# Altium PCB Batarang.PcbDoc
Units mil, origin at the board's own origin, x right, y up, seen from the top; angles counter-clockwise.
Board outline 787.4 x 2047.24 mil, 2 copper layers (Top Layer, Bottom Layer); 53 components, 36 nets, 216 pads, 35 vias.
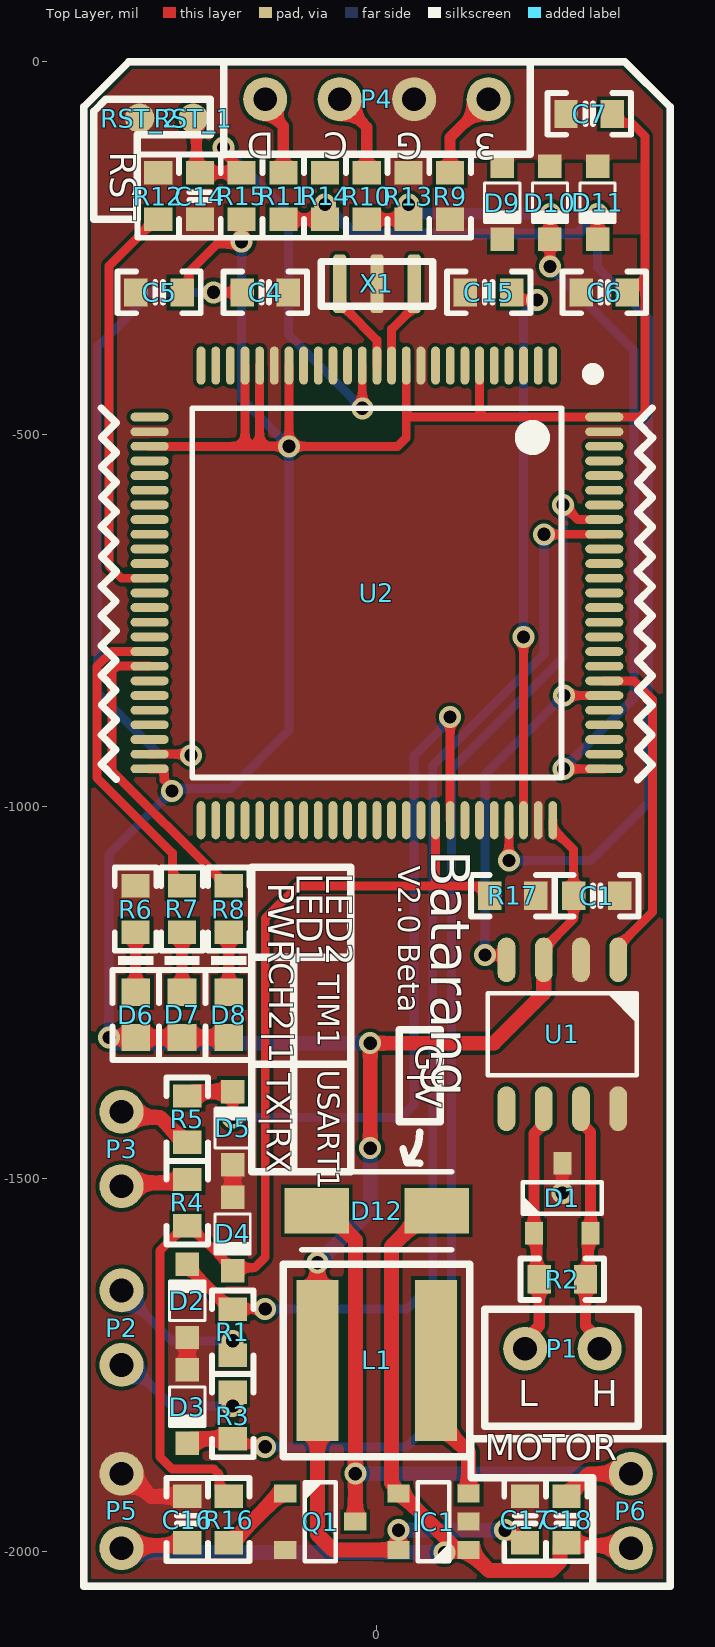
[diagram p0: Top Layer view]
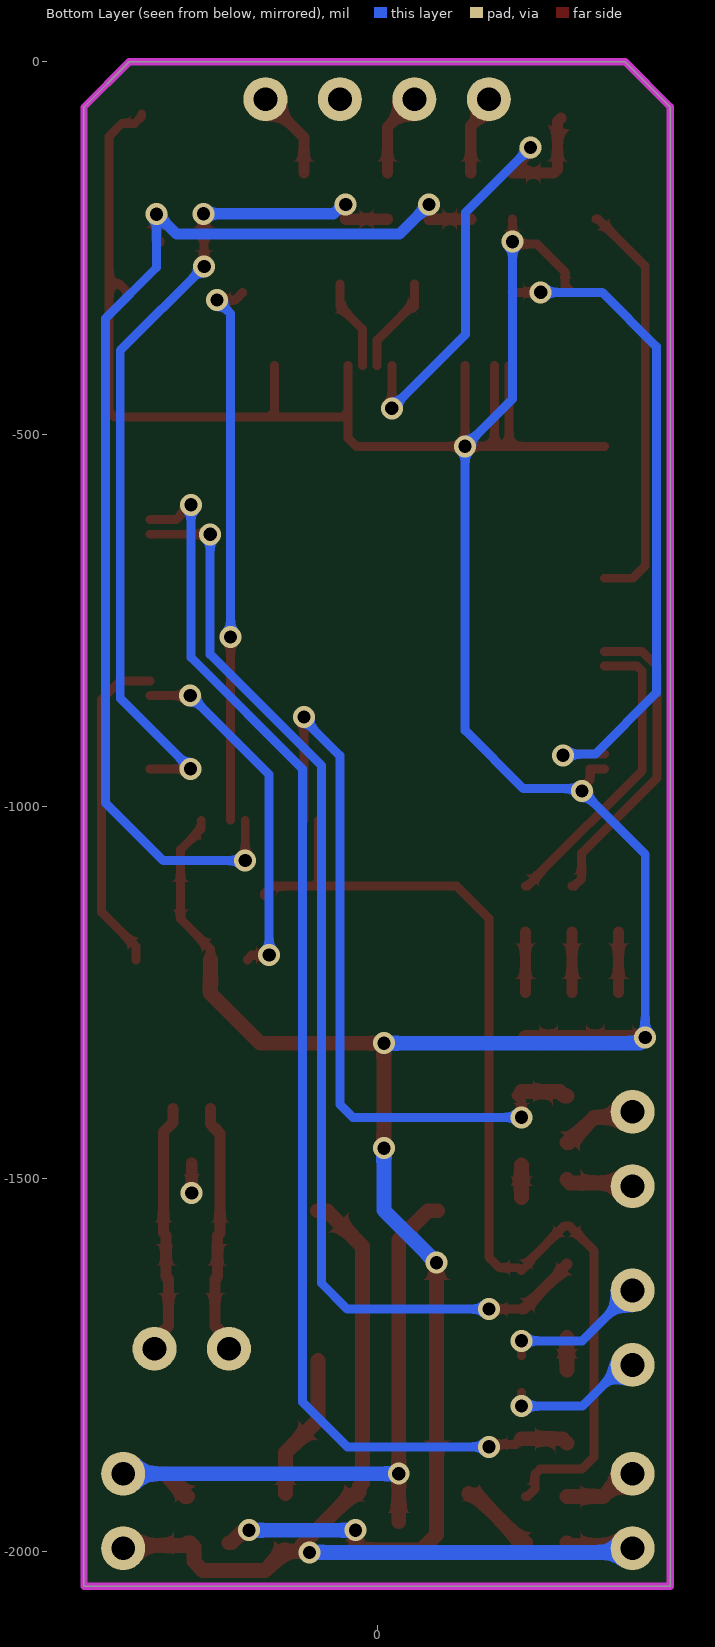
[diagram p1: Bottom Layer view, seen from below]
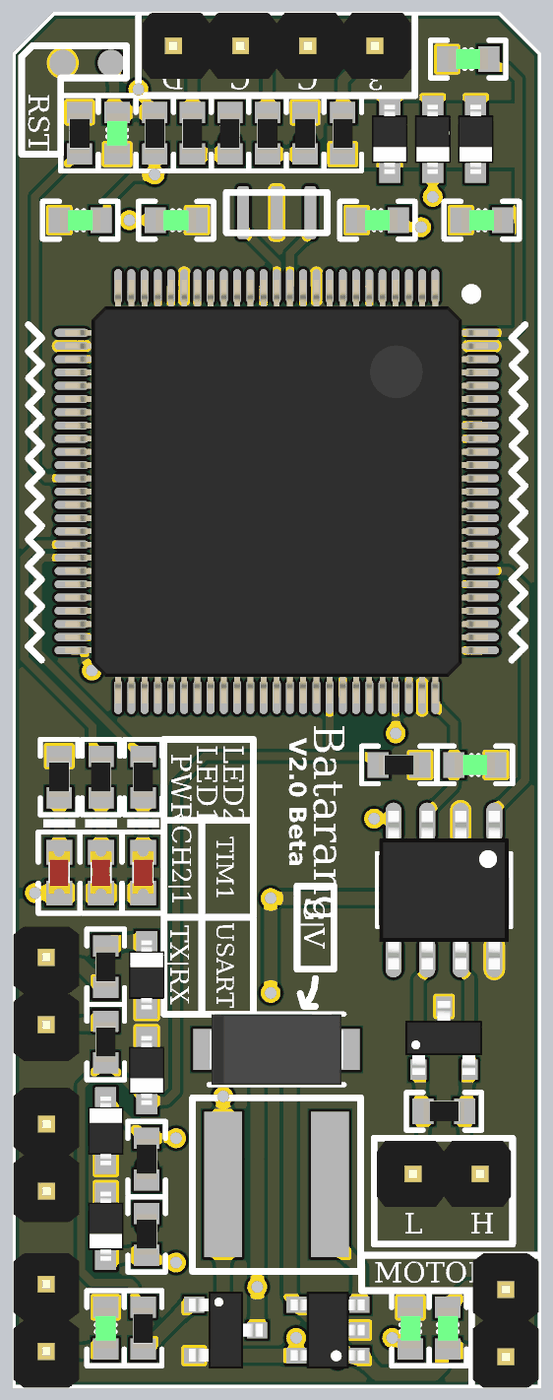
[diagram p2: 3D render of the assembled board from above, using the file's embedded part models]

## Layer stack, top to bottom
Top Solder: solder mask 0.4, Solder Resist, Dk 3.5
Top Layer: signal copper 1.4
Dielectric 1: dielectric 12.6, FR-4, Dk 4.8
Bottom Layer: signal copper 1.4
Bottom Solder: solder mask 0.4, Solder Resist, Dk 3.5

## Board outline
-393.7,-2047.24 -393.7,-60.7 -333,0 332.97,0 393.7,-60.73 393.7,-2047.24

## Design rules (kind name [scope] priority, off if disabled: settings)
Clearance [All] p1: gap=5 ignorepadtopadclearanceinfootprint=TRUE
DiffPairsRouting [All] p1: maxlimit=10 minlimit=10 mostfreqgap=10 toplayer_minwidth=15 toplayer_maxwidth=15 toplayer_prefwidth=15 bottomlayer_minwidth=15 bottomlayer_maxwidth=15 bottomlayer_prefwidth=15 maxuncoupledlength=500
PlaneConnect [All] p1: planeconnectstyle=Direct reliefexpansion=20 reliefentries=4 reliefconductorwidth=10 reliefairgap=10
PolygonConnect [All] p1: connectstyle=Direct reliefconductorwidth=10 reliefentries=4 polygonreliefangle="90 Angle" airgapwidth=10
RoutingVias [All] p1: holewidth=17.72 width=29.53 viastyle="Through Hole" minholewidth=17.72 minwidth=29.53 maxholewidth=17.72 maxwidth=29.53
SolderMaskExpansion [All] p1: expansion=4 istentingtop=FALSE
Width [All] p1: maxlimit=50 minlimit=10 preferedwidth=12
28 further rules are at their usual default settings.

## Classes and differential pairs
component class U_Power: C16 C17 C18 D12 IC1 L1 P5 P6 Q1 R16 R17
component class U_MCU: C4 C5 C6 C7 C14 C15 D9 D10 D11 P4 R9 R10 R11 R12 R13 R14 R15 RST_1 RST_2 U2 X1
component class U_Dev: C1 D1 D2 D3 D4 D5 D6 D7 D8 P1 P2 P3 R1 R2 R3 R4 R5 R6 R7 R8 U1
differential pair OSC: +OSC_P -OSC_N
differential pair CAN: +CAN_P -CAN_N

## Components (designator, comment, footprint, x,y, rotation, side; value= is the part's Value field where it differs from the comment)
C1 "100nF" CAP-0603 295.2,-1119.9 r180 top
C4 "2.2uF" CAP-0603 -150,-309.64 r0 top
C5 "100nF" CAP-0603 -292.61,-309.64 r0 top
C6 "100nF" CAP-0603 305.29,-309.64 r0 top
C7 "100nF" CAP-0603 285,-70 r0 top
C14 "100nF" CAP-0603 -237.7,-180.3 r90 top
C15 "2.2uF" CAP-0603 150,-309.64 r180 top
C16 "4.7uF" CAP-0603 -254.7,-1957.69 r270 top
C17 "10uF" CAP-0603 199,-1957.69 r270 top
C18 "10uF" CAP-0603 254.68,-1957.69 r270 top
D1 "PESD2CAN" SOT-23-3 249,-1526 r270 top
D2 "BZT52C3V9S-7-F" SOD_323 -254.7,-1663.99 r270 top
D3 "BZT52C3V9S-7-F" SOD_323 -254.7,-1806 r90 top
D4 "BZT52C3V9S-7-F" SOD_323 -193.7,-1574.21 r90 top
D5 "BZT52C3V9S-7-F" SOD_323 -193.7,-1432.2 r270 top
D6 "RED" LED_0603 -324,-1280 r270 top
D7 "RED" LED_0603 -261.7,-1280 r270 top
D8 "GREEN" LED_0603 -199,-1280 r270 top
D9 "BZT52C3V9S-7-F" SOD_323 168.3,-189.32 r90 top
D10 "BZT52C3V9S-7-F" SOD_323 232.3,-189.32 r90 top
D11 "BZT52C3V9S-7-F" SOD_323 296.3,-189.32 r90 top
D12 "SS14" DO-214AC_SMA -0.32,-1543 r0 top
IC1 "XM5062_33" SOT-23-5 76,-1960.54 r0 top
L1 "2.2uH" XAL6060-103MEB -0.32,-1743.96 r180 top
P1 "HDR1x2_2.54" HDR1X2_2.54_180 299,-1728.31 r270 top
P2 "HDR1x2_2.54" HDR1X2_2.54_180 -343,-1750 r180 top
P3 "HDR1x2_2.54" HDR1X2_2.54_180 -343,-1410.05 r0 top
P4 "HDR1x4_2.54" HDR1x4_2.54_180 -150,-50.27 r90 top
P5 "HDR1x2_2.54" HDR1X2_2.54_180 -343,-1896.17 r0 top
P6 "HDR1x2_2.54" HDR1X2_2.54_180 341,-1996.17 r180 top
Q1 "SI2302DS" SOT-23-3 -76,-1960.54 r180 top
R1 "100R" R-0603 -193.7,-1706.1 r90 top
R2 "120R" R-0603 249,-1635 r0 top
R3 "100R" R-0603 -193.7,-1818.06 r270 top
R4 "100R" R-0603 -254.7,-1532.1 r270 top
R5 "100R" R-0603 -254.7,-1419.99 r90 top
R6 "4.7K" R-0603 -324,-1137.9 r90 top
R7 "4.7K" R-0603 -261.7,-1137.9 r90 top
R8 "4.7K" R-0603 -199,-1137.9 r90 top
R9 "0R" R-0603 98.3,-180.3 r270 top
R10 "100R" R-0603 -13.7,-180.3 r270 top
R11 "100R" R-0603 -125.7,-180.3 r270 top
R12 "10K" R-0603 -293.7,-180.3 r270 top
R13 "10K" R-0603 42.3,-180.3 r270 top
R14 "10K" R-0603 -69.7,-180.3 r270 top
R15 "10K" R-0603 -181.7,-180.3 r270 top
R16 "22R" R-0603 -199,-1957.69 r270 top
R17 "10K" R-0603 182.35,-1119.9 r180 top
RST_1 "TestPoint" TestPoint -246.73,-75.77 r90 top
RST_2 "TestPoint" TestPoint -318.7,-75.77 r90 top
U1 "SN65HVD230DR" SOIC_8 249,-1306 r180 top
U2 "STM32F427VIT6" LQFP_100 0,-713.29 r180 top
X1 "12MHz" CSTCE_G(A)村田晶振 0,-298.2 r180 top

## Footprints (in the part's own frame and the unit in brackets; to place one, negate y for a bottom-side part, rotate by r counter-clockwise, add the part's x,y. Pads: shape width x height; smd on the part's side, far side on the other; paste and mask are expansions set on the pad)
CAP-0603 [mm]
  rect 0.8x0.96 smd: 1(-0.79,0) 2(0.79,0)
  silkscreen extent -1.42,-0.71 1.42,0.71, body extent -0.76,-0.39 0.76,0.39, height 0.9
CSTCE_G(A)村田晶振 [mm]
  rrect50% 0.45x2 smd: 1(1.27,0) 2(0,0) 3(-1.27,0)
  silkscreen extent -1.91,-0.76 1.91,0.76, body extent -1.9,-0.8 1.9,0.8, height 1
DO-214AC_SMA [mm]
  rect 2.2x1.55 smd: 1(-2.05,0) 2(2.05,0)
  silkscreen extent -2.83,-1.33 2.55,1.33, body extent -2.55,-1.33 2.55,1.33, height 2.29
HDR1X2_2.54_180 [mm]
  round 1.5 hole 0.813: 1(0,0) 2(0,-2.54)
  body extent -1.25,-3.81 1.25,1.27, height 8.2
HDR1x4_2.54_180 [mm]
  round 1.5 hole 0.813: 1(0,0) 2(0,-2.54) 3(0,-5.08) 4(0,-7.62)
  body extent -1.25,-8.89 1.25,1.27, height 8.2
LED_0603 [mm]
  rect 0.93x0.98 smd: A(0.77,0) K(-0.77,0)
  silkscreen extent -2.01,-0.79 1.54,0.79, body extent -0.8,-0.4 0.8,0.4, height 0.6
LQFP_100 [mm]
  oval 0.3x1.3 smd: 1(-6,-7.754) 2(-5.5,-7.754) 3(-5,-7.754) 4(-4.5,-7.754) 5(-4,-7.754) 6(-3.5,-7.754) 7(-3,-7.754) 8(-2.5,-7.754) 9(-2,-7.754) 10(-1.5,-7.754) 11(-1,-7.754) 12(-0.5,-7.754) 13(0,-7.754) 14(0.5,-7.754) 15(1,-7.754) 16(1.5,-7.754) 17(2,-7.754) 18(2.5,-7.754) 19(3,-7.754) 20(3.5,-7.754) 21(4,-7.754) 22(4.5,-7.754) 23(5,-7.754) 24(5.5,-7.754) 25(6,-7.754) 51(6,7.754) 52(5.5,7.754) 53(5,7.754) 54(4.5,7.754) 55(4,7.754) 56(3.5,7.754) 57(3,7.754) 58(2.5,7.754) 59(2,7.754) 60(1.5,7.754) 61(1,7.754) 62(0.5,7.754) 63(0,7.754) 64(-0.5,7.754) 65(-1,7.754) 66(-1.5,7.754) 67(-2,7.754) 68(-2.5,7.754) 69(-3,7.754) 70(-3.5,7.754) 71(-4,7.754) 72(-4.5,7.754) 73(-5,7.754) 74(-5.5,7.754) 75(-6,7.754)
  oval 1.3x0.3 smd: 26(7.754,-6) 27(7.754,-5.5) 28(7.754,-5) 29(7.754,-4.5) 30(7.754,-4) 31(7.754,-3.5) 32(7.754,-3) 33(7.754,-2.5) 34(7.754,-2) 35(7.754,-1.5) 36(7.754,-1) 37(7.754,-0.5) 38(7.754,0) 39(7.754,0.5) 40(7.754,1) 41(7.754,1.5) 42(7.754,2) 43(7.754,2.5) 44(7.754,3) 45(7.754,3.5) 46(7.754,4) 47(7.754,4.5) 48(7.754,5) 49(7.754,5.5) 50(7.754,6) 76(-7.754,6) 77(-7.754,5.5) 78(-7.754,5) 79(-7.754,4.5) 80(-7.754,4) 81(-7.754,3.5) 82(-7.754,3) 83(-7.754,2.5) 84(-7.754,2) 85(-7.754,1.5) 86(-7.754,1) 87(-7.754,0.5) 88(-7.754,0) 89(-7.754,-0.5) 90(-7.754,-1) 91(-7.754,-1.5) 92(-7.754,-2) 93(-7.754,-2.5) 94(-7.754,-3) 95(-7.754,-3.5) 96(-7.754,-4) 97(-7.754,-4.5) 98(-7.754,-5) 99(-7.754,-5.5) 100(-7.754,-6)
  silkscreen extent -7.49,-7.59 6.3,6.3, body extent -8,-8 8,8, height 1.72
R-0603 [mm]
  rect 0.8x0.96 smd: 1(-0.79,0) 2(0.79,0)
  silkscreen extent -1.42,-0.71 1.42,0.71, body extent -0.76,-0.38 0.76,0.38, height 0.41
SOD_323 [mm]
  rect 0.8x0.8 smd: 1(1.25,0) 2(-1.25,0)
  silkscreen extent -0.72,-0.6 0.67,0.6, body extent -1.3,-0.68 1.3,0.68, height 1.1
SOIC_8 [mil]
  oval 24x60 smd: 1(-75,-100.02) 2(-25,-100.02) 3(25,-100.02) 4(75,-100.02) 5(75,99.98) 6(25,99.98) 7(-25,99.98) 8(-75,99.98)
  silkscreen extent -100,-55 100,55, body extent -96,-118 96,118, height 69
SOT-23-3 [mil]
  rect 30x24 smd: 1(47,-38) 2(47,38) 3(-47,0)
  silkscreen extent -21,-53 21,53, body extent -55,-57 55,57, height 51
SOT-23-5 [mil]
  rect 30x24 smd: 1(47,-38) 2(47,0) 3(47,38) 4(-47,38) 5(-47,-38)
  silkscreen extent -21,-53 21,53, body extent -55,-57 55,57, height 57
TestPoint [mm]
  round 1 smd: 1(0,0)
XAL6060-103MEB [mm]
  rect 1.43x5.5 smd: 1(-2.02,0) 2(2.02,0)
  silkscreen extent -3.18,-3.28 3.18,3.28

## Part data
C1 C4 C5 C6 C7 C14 C15 C16 C17 C18: library part CAP, "贴片电容", Package=0402, SuppliersPartNumber=C52923, ComponentLink1Description=供应商链接, ComponentLink1URL=http://www.szlcsc.com/product/details_53938.html, Supplier=LC
D1: library part TVS_C2, "TVS 双向x2"
D2 D3 D4 D5 D9 D10 D11: library part TVS, "TVS 二极管"
D6 D7 D8: library part LED, "发光二极管", Package=0603, SuppliersPartNumber=C2290, ComponentLink1Description=供应商链接, ComponentLink1URL=http://www.szlcsc.com/product/details_2663.html, Supplier=LC
D12: library part DIODE, "二极管", Package=SMA(DO-214AC), SuppliersPartNumber=C22452, ComponentLink1Description=供应商链接, ComponentLink1URL=http://www.szlcsc.com/product/details_23178.html, Supplier=LC
IC1: library part XM5062, "降压转换芯片", Manufacturer_Name="TE Connectivity", Manufacturer_Part_Number=1-1393258-5, Datasheet Link=http://www.te.com/commerce/DocumentDelivery/DDEController?Action=showdoc&DocId=Data+Sheet%7FSR2M%7F1116%7Fpdf%7FEnglish%7FENG_DS_SR2M_1116.pdf%7F1-1393258-5, Height=25mm
L1: library part INDUCTOR, "贴片电感", Package=0402, SuppliersPartNumber=C32041, ComponentLink1Description=供应商链接, ComponentLink1URL=http://www.szlcsc.com/product/details_33003.html, Supplier=LC
P1 P2 P3 P4 P5 P6: "Header"
Q1: library part N-MOS, "N 沟道 MOS", Manufacturer_Name=Nexperia, Mouser Part Number=N/A, RS Part Number=7983053P, Datasheet Link=https://assets.nexperia.com/documents/data-sheet/SI2302DS.pdf, Height=1.1mm, Manufacturer_Part_Number=SI2302DS, Mouser Price/Stock=https://www.mouser.com/Search/Refine.aspx?Keyword=N%2FA, RS Price/Stock=http://uk.rs-online.com/web/p/products/7983053P
R1 R2 R3 R4 R5 R6 R7 R8 R9 R10 R11 R12 R13 R14 R15 R16 R17: library part RES, "贴片电阻", Package=0805, SuppliersPartNumber=C17798, Supplier=LC
U1: "CAN 控制器（3.3V）"
U2: library part STM32F427Vx, "微控制器", I/Os (High Current)=82, Manufacturer=STMicroelectronics, Operating Frequency(F) (Processor speed) (MHz)=168, Supplier Part Number 1=497-14049-ND, Supply Voltage(Vcc) max (V)=3.6, Supply Voltage(Vcc) min (V)=1.8, ComponentLink1Description="Manufacturer URL", ComponentLink1URL=http://www.st.com/web/en/home.html, ComponentLink2Description=Datasheet, ComponentLink2URL=http://www.st.com/st-web-ui/static/active/en/resource/technical/document/datasheet/DM00071990.pdf, ComponentLink3Description="Package Specification", ComponentLink3URL=http://www.st.com/st-web-ui/static/active/en/resource/technical/document/data_brief/DM00071938.pdf, Core="ARM Cortex-M4", D/A Converter=2x12-bit, DatasheetVersion="Rev. 1", FLASH Size (Prog) (kB)=2048, Internal RAM Size (kB)=256, Mounting Technology="Surface Mount", PackageDescription="100-Pin Low Profile Quad Flat Package, 14 x 14 mm Body, 0.5 mm Pitch", PackageReference=LQFP100, PackageVersion="Rev. 1, 06/2013", Packing=Tray, PartNumber=STM32F427VIT6, Supplier 1=Digi-Key, Supplier 2=Farnell, Supplier 3=Newark, Supplier 4=Newark, Supplier 5=Mouser, Supplier Part Number 2=2333369, Supplier Part Number 3=99W9927, Supplier Part Number 4=66W7312, Supplier Part Number 5=511-STM32F427VIT6
X1: library part XTAL, "有源晶振"

## Via types
v1: diameter 29.53, hole 17.72, Top Layer to Bottom Layer, 35 vias

## Nets (pads, with @x,y where several pads share a name; then routed paths per layer and width w, separated by ;. In a path a pad name is that pad's centre, name@x,y a point inside that pad or via, vN(x,y) a via of type N, cw(c..) or ccw(c..) an arc to the next point about the centre after c; other vN are vias at no path point)
3.3V: C1.2 C5.2 C6.2 C7.2 C17.2 D6.A D7.A D8.A D9.2 IC1.5 L1.2 R9.2 R15.2 U1.3 U2.6 U2.11 U2.19 U2.21 U2.22 U2.28 U2.50 U2.75 U2.100 | length 5116.4
  Top Layer w12: U2.50 -285.8,-949.51 -285.7,-949.61 -285.7,-964.36 -275.3,-974.76 v1(-275.3,-979.5) ; U2.28 -177.17,-516.44 ; C5.2 -252.52,-300.65 -252.52,-282.52 -214.99,-244.99 -185.16,-244.99 v1(-181.8,-241.64) -181.8,-211.5 R15.2 ; U2.22 -177.17,-516.44 ; U2.21 -157.48,-516.44 ; U2.19 v1(-118.11,-516.44) ; U2.11 39.37,-470.04 ; U2.6 137.89,-408.09 137.89,-470.04 144.92,-477.07 ; U1.3 224,-1191.23 233.24,-1181.98 264.09,-1151.13 C1.2 264.09,-1057.95 236.22,-1030.08 U2.75 ; C7.2 316.1,-73.15 325.85,-82.9 342.9,-82.9 360,-100 360,-298.2 ; C6.2 336.39,-307.95 346.14,-298.2 360,-298.2 ; -177.17,-516.44 -157.48,-516.44 ; -157.48,-516.44 v1(-118.11,-516.44) ; v1(-118.11,-516.44) 27.93,-516.44 39.37,-505 39.37,-470.04 ; 39.37,-470.04 46.4,-477.07 144.92,-477.07 ; 144.92,-477.07 U2.100 352.97,-477.07 360,-470.04 360,-298.2
  Top Layer w20: v1(-360,-1310.32) D6.A D7.A D8.A ; v1(-79.68,-1612.81) -79.76,-1612.89 -79.76,-1743.88 L1.2 -79.84,-1977.75 -59.06,-1998.54 IC1.5 v1(29,-1972) ; v1(-9,-1459) v1(-9,-1318) 157,-1318 224,-1251 U1.3 ; v1(172,-1972) 173.82,-1973.82 180.87,-1973.82 195.85,-1988.8 C17.2
  Bottom Layer w12: v1(-360,-1310.32) -360,-1064.2 -271.95,-976.15 -196.32,-976.15 -118.11,-897.94 v1(-118.11,-516.44) -181.8,-452.75 v1(-181.8,-241.64)
  Bottom Layer w20: v1(-360,-1310.32) -352.32,-1318 v1(-9,-1318) ; v1(-79.68,-1612.81) -9,-1542.12 v1(-9,-1459) ; v1(29,-1972) v1(172,-1972)
3V3: R14.1
AGND: C1.1 C4.2 C5.1 C6.1 C7.1 C14.1 C15.2 C16.1 C17.1 D1.3 D2.1 D3.1 D4.1 D5.1 D9.1 D10.1 D11.1 IC1.2 P4.3 P5.1 Q1.2 R6.2 R12.1 R13.1 R17.1 RST_2.1 U1.2 U1.8 U2.10 U2.20 U2.27 U2.74 U2.99 X1.2 | length 228.1
  Top Layer w15: v1(249,-1519) D1.3
  Top Layer w20: P5.1 -334.01,-1896.17 -303.6,-1926.59 C16.1 ; D3.1 D2.1 ; D4.1 D5.1
BOOT0: U2.94
BOOT1: R12.2 U2.37 | length 556.3
  Top Layer w12: U2.37 -343,-693.61 -360,-676.61 -360,-274.55 -296.85,-211.4 R12.2
CAN_N: D1.1 P1.2 R2.1 U1.6 | length 338.4
  Top Layer w15: P1.2 199,-1716.39 217.89,-1697.49 R2.1 214.45,-1631.55 214.45,-1576.45 D1.1 211,-1439.42 224,-1426.42 U1.6
CAN_P: D1.2 P1.1 R2.2 U1.7 | length 338.4
  Top Layer w15: U1.7 274,-1424.27 287,-1437.27 D1.2 283.55,-1576.45 283.55,-1631.55 R2.2 280.1,-1697.49 299,-1716.39 P1.1
NetC4_1: C4.1 U2.49 | length 905.6
  Top Layer w12: U2.49 -305.2,-929.73 -251.27,-929.73 v1(-249.59,-931.41) ; v1(-219.64,-309.64) C4.1
  Bottom Layer w12: v1(-249.59,-931.41) -251.17,-929.83 -292.61,-929.83 -375,-847.43 -375,-382.57 -302.06,-309.64 v1(-219.64,-309.64)
NetC15_1: C15.1 U2.73 | length 744.6
  Top Layer w12: C15.1 181.1,-310.25 190.85,-320 v1(215,-320) ; U2.73 v1(196.85,-772.35)
  Bottom Layer w12: v1(196.85,-772.35) 196.85,-338.15 v1(215,-320)
NetC18_1: C18.1 D12.1 P6.2 Q1.3 | length 917.3
  Top Layer w20: D12.1 -68.23,-1543 -29,-1582.23 v1(-29,-1896.17) Q1.3 ; C18.1 257.83,-1926.59 263.58,-1920.84 263.58,-1917.69 285.1,-1896.17 P6.2
  Bottom Layer w20: v1(-29,-1896.17) P6.2
NetD2_2: D2.2 R1.2 U2.92 | length 1519.2
  Top Layer w12: R1.2 v1(-150,-1675) ; v1(224.24,-634.55) U2.92
  Top Layer w15: D2.2 -246.45,-1623.03 -246.45,-1625.4 -196.85,-1675 R1.2
  Bottom Layer w12: v1(-150,-1675) 40,-1675 75,-1640 75,-945 224.24,-795.76 224.24,-635.45 224.68,-635 v1(224.24,-634.55)
NetD3_2: D3.2 R3.2 U2.93 | length 1717.2
  Top Layer w12: R3.2 -186.22,-1856.65 -153.35,-1856.65 v1(-150,-1860) ; v1(250,-595) 269.87,-614.87 U2.93
  Top Layer w20: D3.2 -248.65,-1849.17 R3.2
  Bottom Layer w12: v1(-150,-1860) 40,-1860 100,-1800 100,-950 250,-800 v1(250,-595)
NetD4_2: D4.2 R4.2 R16.1 R17.2 U2.67 | length 1510.7
  Top Layer w12: R16.1 -202.15,-1926.59 -211.9,-1916.84 -211.9,-1897.03 -218.93,-1890 -274.6,-1890 -291.42,-1873.18 -291.42,-1596.77 -257.85,-1563.2 R4.2 -251.55,-1563.2 -201.95,-1612.81 -201.95,-1615.18 D4.2 -189.84,-1619.57 -164.24,-1619.57 -150,-1605.33 -150,-1150.38 -106.62,-1107 134.21,-1107 ; U2.67 78.74,-1099.97 85.77,-1107 R17.2@141.5,-1107 ; R17.2@143,-1108.5 151.24,-1116.75 R17.2
NetD5_2: D5.2 R5.2 U2.68 | length 1025.7
  Top Layer w12: v1(-193.7,-1417.53) -193.7,-1395.47 D5.2@-186.22,-1387.98 ; v1(98.3,-880) 98.3,-1018.46 U2.68
  Top Layer w20: R5.2 -251.55,-1388.89 -245.65,-1382.99 D5.2
  Bottom Layer w12: v1(-193.7,-1417.53) 32.53,-1417.53 50,-1400.05 50,-931.66 98.3,-883.36 v1(98.3,-880)
NetD6_K: D6.K R6.1 | length 80.7
  Top Layer w15: D6.K R6.1
NetD7_K: D7.K R7.1 | length 80.7
  Top Layer w15: D7.K R7.1
NetD8_K: D8.K R8.1 | length 80.7
  Top Layer w15: D8.K R8.1
NetIC1_3: IC1.3 L1.1 | length 196.7
  Top Layer w20: L1.1 79.21,-1824.08 123,-1867.87 IC1.3
NetP2_1: P2.1 R3.1 | length 190.5
  Top Layer w12: v1(-193.7,-1805.3) R3.1
  Bottom Layer w12: P2.1 -330.6,-1750 -275.3,-1805.3 v1(-193.7,-1805.3)
NetP2_2: P2.2 R1.1 | length 196.8
  Top Layer w12: R1.1 v1(-193.7,-1717.7)
  Bottom Layer w12: P2.2 -275.3,-1717.7 v1(-193.7,-1717.7)
NetP3_1: P3.1 R5.1 | length 105.3
  Top Layer w20: P3.1 -335.53,-1417.53 -291.42,-1417.53 -257.85,-1451.09 R5.1
NetP3_2: P3.2 R4.1 | length 92
  Top Layer w20: P3.2 -338.47,-1505.53 -259.23,-1505.53 R4.1
NetP4_1: P4.1 R11.1 | length 109
  Top Layer w15: P4.1 -150,-62.19 -125.7,-86.49 R11.1
NetP4_2: P4.2 R10.1 | length 114
  Top Layer w15: P4.2 -50,-51.25 -13.7,-87.55 R10.1
NetP4_4: P4.4 R9.1 | length 120.3
  Top Layer w15: R9.1 98.3,-101.97 P4.4
NetQ1_1: Q1.1 R16.2 | length 103.4
  Top Layer w20: R16.2 -195.85,-1988.8 -131.6,-1924.54 -125,-1924.54 Q1.1
NetR7_2: R7.2 U2.42 | length 423
  Top Layer w12: U2.42 -356.03,-792.03 -376,-812 -376,-961.28 -274.6,-1062.69 -274.6,-1097.05 -264.85,-1106.8 R7.2
NetR8_2: R8.2 U2.43 | length 408.6
  Top Layer w12: U2.43 -349,-811.72 -356.03,-818.75 -356.03,-951.97 -211.9,-1096.1 -211.9,-1097.05 -202.15,-1106.8 R8.2
NetU1_1: U1.1 U2.82 | length 443.7
  Top Layer w12: U2.82 345,-831.4 370,-856.4 370,-1141.98 324,-1187.98 U1.1
NetU1_4: U1.4 U2.81 | length 478.9
  Top Layer w12: v1(145,-1199.74) 168.45,-1199.74 174,-1205.28 U1.4 ; v1(251.09,-851.09) U2.81 U2.81@305.39,-851.18
  Bottom Layer w12: v1(145,-1199.74) 145,-957.17 v1(251.09,-851.09)
NRST: C14.2 R15.1 RST_1.1 U2.14 | length 663.6
  Top Layer w12: v1(-206,-115) -206,-121.5 -180,-147.5 R15.1 ; v1(-19.69,-465.31) U2.14
  Top Layer w15: RST_1.1 -242.22,-80.28 -242.22,-144.68 C14.2 R15.1
  Bottom Layer w12: v1(-206,-115) -118.9,-202.1 -118.9,-366.1 v1(-19.69,-465.31)
OSC_N: U2.13 X1.1 | length 133.4
  Top Layer w12: X1.1 -50,-328.72 -47.14,-331.57 -42.13,-331.57 0,-373.7 U2.13
OSC_P: U2.12 X1.3 | length 122.4
  Top Layer w12: U2.12 19.68,-359.03 50,-328.72 X1.3
SWCLK: D10.2 R10.2 R13.2 U2.76 | length 1158.2
  Top Layer w12: v1(232.3,-275) D10.2 ; v1(250.49,-949.51) U2.76
  Top Layer w15: R10.2 R13.2 v1(42.3,-191.71) ; D10.2 232.8,-238.04 232.8,-204.7 v1(233.3,-204.2)
  Bottom Layer w12: v1(232.3,-275) 345,-387.7 345,-855 v1(250.49,-949.51)
  Bottom Layer w15: v1(42.3,-191.71) 46.23,-191.71 58.73,-204.2 v1(233.3,-204.2)
SWDIO: D11.2 R11.2 R14.2 U2.72 | length 1600.7
  Top Layer w12: v1(177.17,-1072.83) U2.72
  Top Layer w15: R11.2 R14.2 v1(-69.7,-191.71) ; D11.2@293.12,-241.72 D11.2 v1(296.3,-204.7)
  Bottom Layer w12: v1(177.17,-1072.83) 287.17,-1072.83 365,-995 365,-345 296.3,-276.3 v1(296.3,-204.7)
  Bottom Layer w15: v1(-69.7,-191.71) -29.94,-231.47 269.54,-231.47 v1(296.3,-204.7)
VBAT: C16.2 C18.2 D12.2 IC1.1 IC1.4 P5.2 P6.1 | length 1340.5
  Top Layer w20: P5.2 -339.31,-1992.48 -258.39,-1992.48 C16.2 ; D12.2 67.6,-1543 19.68,-1590.91 19.68,-1908.83 24,-1913.14 24,-1920.54 26,-1922.54 IC1.4 31,-1924.54 34,-1924.54 v1@100.97,-1991.52 ; v1(90.73,-2001.76) 92.34,-2000.15 100.97,-2000.15 121.39,-2000.15 IC1.1 126,-1998.54 128,-2000.54 128,-2003.54 150.46,-2026 234.07,-2026 245.79,-2014.28 245.79,-1994.54 251.54,-1988.8 C18.2 258.37,-1992.48 337.31,-1992.48 P6.1
  Bottom Layer w20: P5.2 -337.41,-2001.76 v1(90.73,-2001.76)
pads on no net: U1.5 U2.1 U2.2 U2.3 U2.4 U2.5 U2.7 U2.8 U2.9 U2.15 U2.16 U2.17 U2.18 U2.23 U2.24 U2.25 U2.26 U2.29 U2.30 U2.31 U2.32 U2.33 U2.34 U2.35 U2.36 U2.38 U2.39 U2.40 U2.41 U2.44 U2.45 U2.46 U2.47 U2.48 U2.51 U2.52 U2.53 U2.54 U2.55 U2.56 U2.57 U2.58 U2.59 U2.60 U2.61 U2.62 U2.63 U2.64 U2.65 U2.66 U2.69 U2.70 U2.71 U2.77 U2.78 U2.79 U2.80 U2.83 U2.84 U2.85 U2.86 U2.87 U2.88 U2.89 U2.90 U2.91 U2.95 U2.96 U2.97 U2.98

## Polygon pours and split planes (outlines as drawn)
3.3V on Top Layer "3.3V_L01_P002" (solid, remove dead copper, pour order 2): 75,-231.47 365,-231.47 365,-136 80,-136 75,-136
AGND on Top Layer "AGND_L01_P000" (solid, remove dead copper, pour order 0): -886.7,330.45 763.3,330.45 763.3,-2204.55 -971.7,-2204.55 -971.7,336.45
no net on Bottom Layer "NONET_L02_P003" (solid, remove dead copper, pour order 3): -856.5,285 793.5,285 793.5,-2250 -941.5,-2250 -941.5,291
no net on Bottom Layer "NONET_L02_P001" (solid, pour order 1): 80,-136

## Keep-outs
Keep-Out Layer:
  lines w10: -393.7,-2047.24 -393.7,-60.7 -333,0 0,0 332.97,0 393.7,-60.73 393.7,-2047.24 -393.7,-2047.24

## Silkscreen, mask and mechanical layers (free items; w line width, h text height)
Top Overlay:
  lines w10: -370,-465 -350,-485 ; -350.56,-804.13 -370.19,-823.76 -370.19,-824.13 -350.56,-843.76 -350.56,-844.13 -369.87,-863.45 -369.87,-864.13 -350.19,-883.82 -350.19,-884.13 -370.19,-904.13 -350.56,-923.76 -370.4,-943.6 -350.19,-963.82 ; -350.37,-803.95 -370,-784.32 -350,-764.32 -370.21,-744.1 -350.37,-724.26 -370,-704.63 -350,-684.63 -350,-684.32 -369.69,-664.63 -369.69,-663.95 -350.37,-644.63 -350.37,-644.26 -370,-624.63 -370,-624.26 -350.37,-604.63 ; -350.19,-604.44 -369.82,-584.81 -349.82,-564.81 -349.82,-564.5 -369.5,-544.81 -369.5,-544.13 -350.19,-524.81 -350.19,-524.44 -369.82,-504.81 -369.82,-504.44 -350.19,-484.81 ; -167.9,-1346.44 -35,-1346.44 ; -167.9,-1081.46 -167.9,-1202.33 ; -165,-1081.9 -35,-1081.9 -35,-1202.33 ; -111.54,-1490.56 -111.54,-1202.33 -167.9,-1202.33 ; 30.24,-1335 30.24,-1300 85,-1300 85,-1423.66 30.24,-1423.66 30.24,-1315.75 ; 57.62,-1479 40.5,-1478.78 ; 57.62,-1437.44 cw(c-0.84,-1437.44) 40.5,-1478.78 ; 350,-964 369.63,-944.37 369.63,-944 350,-924.37 350,-924 369.32,-904.69 369.32,-904 349.63,-884.32 349.63,-884 369.63,-864 350,-844.37 ; 350.18,-844.19 369.81,-824.56 369.81,-824.19 350.18,-804.56 350.18,-804.19 369.5,-784.87 369.5,-784.19 349.81,-764.5 349.81,-764.19 369.81,-744.19 350.18,-724.56 370.03,-704.71 349.81,-684.5 369.81,-664.5 350.18,-644.87 ; 350.37,-644.69 370,-625.06 370,-624.69 350.37,-605.06 350.37,-604.69 369.69,-585.37 369.69,-584.69 350,-565 350,-564.69 370,-544.69 350.37,-525.06 370.21,-505.21 350,-485 370,-465 ; -167.9,-1202.33 -167.9,-1490.56 -35,-1490.56 -35,-1202.33 ; -167.9,-1202.33 -35,-1202.33 ; 40.5,-1478.78 35,-1460 40.5,-1478.78 ; 290.08,-2047 290.08,-1901.69 ; 290.08,-2047 290.08,-1901.69 ; 290.08,-2047 394,-2047 ; 290.08,-1901.69 171,-1901.69 126.35,-1901.69 126.35,-1849.17 394,-1849.17 394,-2047 ; 394,-2047 -393.7,-2047 -393.7,-60.7 -333,0 333,0 393.7,-60.7 394,-2047 ; -380,-211.4 -380,-66.22 -364.05,-50.27 -223.92,-50.27 -223.92,-98 -321.7,-98 -321.7,-211.4 -380,-211.4 ; -206,-124.3 -206,0 -200,0 206,0 206,-124.3 -206,-124.3 ; 145,-1832.57 145,-1675 351.2,-1675 351.2,-1832.57 145,-1832.57
  text "D" at -138.19,-83.78 h60 r180
  text "C" at -38.7,-84.17 h60 r180
  text "G" at 61.84,-84.62 h60 r180
  text "3" at 160.25,-85.07 h60 r180
  text "RST" at -369.55,-120.96 h60 r270
  text "Batarang" at 55.17,-1058.57 h90 r270
  text "V2.0 Beta" at 18.64,-1079.41 h50 r270
  text "LED1" at -118.9,-1090.09 h60 r270
  text "LED2" at -79.76,-1089.94 h60 r270
  text "PWR" at -157.48,-1102.55 h60 r270
  text "CH2|1" at -155.6,-1208.97 h55 r270
  text "TIM1" at -89.76,-1226.27 h50 r270
  text "G|V" at 40.5,-1319.07 h60 r270
  text "USART1" at -89.39,-1353.44 h50 r270
  text "TX|RX" at -158.49,-1358.07 h55 r270
  text "L" at 189.59,-1816.83 h60
  text "H" at 287.69,-1816.83 h60
  text "MOTOR" at 144.55,-1889.55 h60
Mechanical 1:
  the board outline again, w10